# Altium PCB ESP32-S3-size-pcb-ad.PcbDoc
Units mil, origin at the board's own origin, x right, y up, seen from the top; angles counter-clockwise.
Board outline 1100 x 2250 mil, 2 copper layers (Top Layer, Bottom Layer); 5 components, 0 nets, 121 pads, 0 vias.
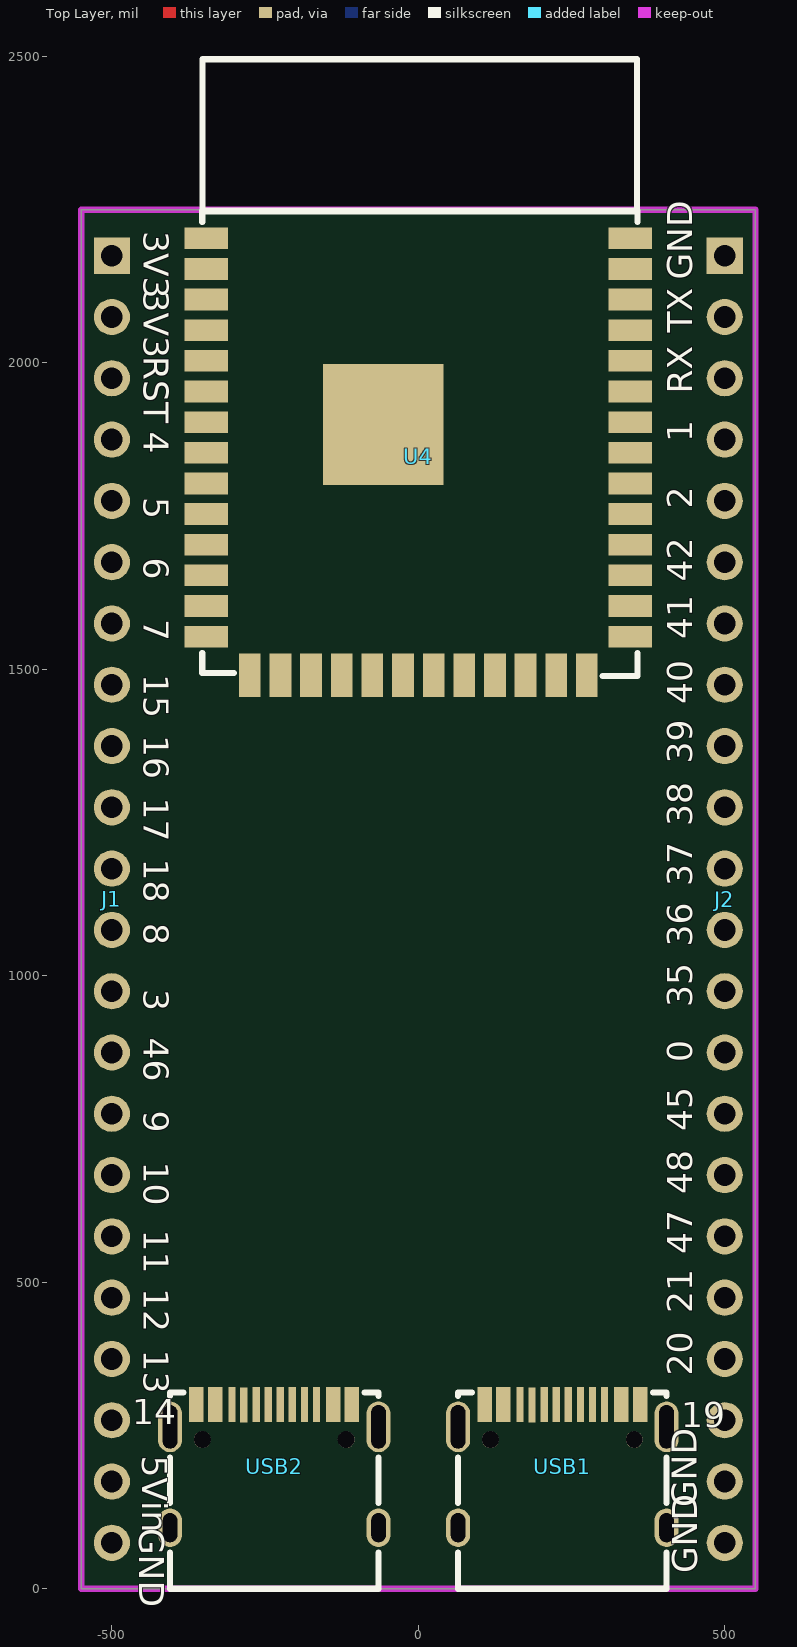
[diagram p0: Top Layer view]
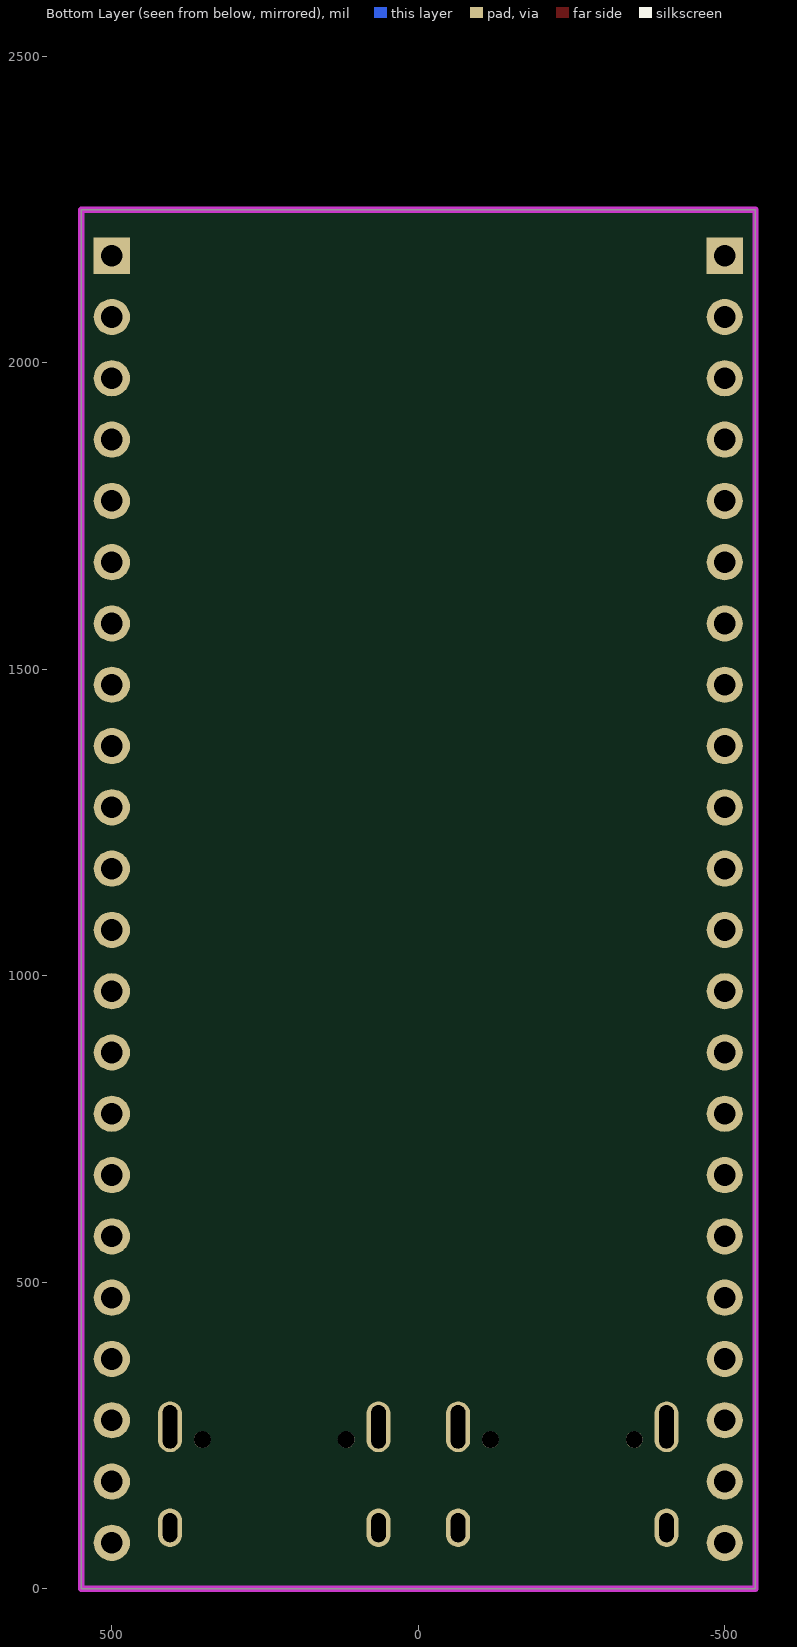
[diagram p1: Bottom Layer view, seen from below]

## Layer stack, top to bottom
Top Solder: solder mask 0.4, Solder Resist, Dk 3.5
Top Layer: signal copper 1.4
Dielectric 1: dielectric 12.6, FR-4, Dk 4.8
Bottom Layer: signal copper 1.4
Bottom Solder: solder mask 0.4, Solder Resist, Dk 3.5

## Board outline
-550,0 -550,2250 550,2250 550,0

## Design rules (kind name [scope] priority, off if disabled: settings)
Clearance [All] p1: gap=6 ignorepadtopadclearanceinfootprint=FALSE
ComponentClearance [All] p1: gap=0 collisioncheckmode=3 verticalgap=0 showdistances=FALSE
HoleToHoleClearance [All] p1: gap=0 allowstackedmicrovias=TRUE
MinimumSolderMaskSliver [All] p1: minsoldermaskwidth=0
PolygonConnect PolygonConnect_1 [(InPadClass('All Pads'))] p1: connectstyle=Relief reliefconductorwidth=20 reliefentries=4 polygonreliefangle="90 Angle" airgapwidth=10
PolygonConnect [All] p2: connectstyle=Direct reliefconductorwidth=10 reliefentries=4 polygonreliefangle="90 Angle" airgapwidth=10
RoutingVias [All] p1: holewidth=28 width=50 viastyle="Through Hole" minholewidth=28 minwidth=50 maxholewidth=28 maxwidth=50
SilkToSilkClearance [All] p1: silktosilkclearance=0
SilkToSolderMaskClearance [IsPad] p1: minsilkscreentomaskgap=0 clearancetoexposedcopper=TRUE
SolderMaskExpansion [All] p1: expansion=4 istentingtop=FALSE
Width [All] p1: maxlimit=100 minlimit=7 preferedwidth=7
25 further rules are at their usual default settings.

## Components (designator, comment, footprint, x,y, rotation, side; value= is the part's Value field where it differs from the comment)
J1 "Header 22" HDR1X22 -500,2175 r270 top
J2 "Header 22" HDR1X22 500,2175 r270 top
U4 "ESP32-S3-WROOM-1" WIFIM-SMD_39P-L25.5-W18.0-P1.27 0,1850 r0 top locked
USB1 "TYPEC-304-BCP16" USB-C-SMD_TYPEC-304-BCP16 235,200 r0 top locked
USB2 "TYPEC-304-BCP16" USB-C-SMD_TYPEC-304-BCP16 -235,200 r0 top locked

## Footprints (in the part's own frame and the unit in brackets; to place one, negate y for a bottom-side part, rotate by r counter-clockwise, add the part's x,y. Pads: shape width x height; smd on the part's side, far side on the other; paste and mask are expansions set on the pad)
HDR1X22 [mm] "Connector; Header; 22 Position"
  rect 1.5x1.5 hole 0.9: 1(0,0)
  round 1.5 hole 0.9: 2(2.54,0) 3(5.08,0) 4(7.62,0) 5(10.16,0) 6(12.7,0) 7(15.24,0) 8(17.78,0) 9(20.32,0) 10(22.86,0) 11(25.4,0) 12(27.94,0) 13(30.48,0) 14(33.02,0) 15(35.56,0) 16(38.1,0) 17(40.64,0) 18(43.18,0) 19(45.72,0) 20(48.26,0) 21(50.8,0) 22(53.34,0)
USB-C-SMD_TYPEC-304-BCP16 [mm]
  oval 1x2.1 hole 0.6 slot 1.8 at 90 deg: 13(-4.32,1.633) 14(4.32,1.633)
  oval 1x1.6 hole 0.6 slot 1.2 at 90 deg: 15(-4.32,-2.547) 16(4.32,-2.547)
  rect 0.6x1.45 smd: A1B12(-3.225,2.547) A4B9(-2.45,2.547) B1A12(3.22,2.547) B4A9(2.45,2.547)
  rect 0.3x1.45 smd: A5(-1.26,2.532) A6(-0.25,2.547) A7(0.25,2.547) A8(1.25,2.547) B5(1.75,2.547) B6(0.75,2.547) B7(-0.75,2.547) B8(-1.75,2.547)
  round 0.7 hole 0.7 unplated: ""(-2.98,1.102) ""(2.98,1.102)
  silkscreen extent -4.32,-5.08 4.32,3.05, body extent -4.44,-5.21 4.49,2.37, height 3.25
WIFIM-SMD_39P-L25.5-W18.0-P1.27 [mm]
  rect 1.8x0.9 smd: 1(-8.786,8.979) 2(-8.786,7.709) 3(-8.786,6.439) 4(-8.786,5.169) 5(-8.786,3.899) 6(-8.786,2.629) 7(-8.786,1.359) 8(-8.786,0.089) 9(-8.786,-1.181) 10(-8.786,-2.451) 11(-8.786,-3.721) 12(-8.786,-4.991) 13(-8.786,-6.261) 14(-8.786,-7.531) 27(8.786,-7.531) 28(8.786,-6.261) 29(8.786,-4.991) 30(8.786,-3.721) 31(8.786,-2.451) 32(8.786,-1.181) 33(8.786,0.089) 34(8.786,1.359) 35(8.786,2.629) 36(8.786,3.899) 37(8.786,5.169) 38(8.786,6.439) 39(8.786,7.709) 40(8.786,8.979)
  rect 0.9x1.8 smd: 15(-6.985,-9.129) 16(-5.715,-9.129) 17(-4.445,-9.129) 18(-3.175,-9.129) 19(-1.905,-9.129) 20(-0.635,-9.129) 21(0.635,-9.129) 22(1.905,-9.129) 23(3.175,-9.129) 24(4.445,-9.129) 25(5.715,-9.129) 26(6.985,-9.129)
  rect 5x5 smd: 41(-1.453,1.259)
  silkscreen extent -8.95,-9.16 9.08,16.4

## Part data
J1 J2: "Header, 22-Pin", LatestRevisionDate=17-Jul-2002, LatestRevisionNote="Re-released for DXP Platform.", Publisher="Altium Limited"
U4: BOM_JLCPCB Part Class="Extended Part", BOM_Manufacturer="Espressif Systems", BOM_Manufacturer Part=ESP32-WROOM-32(8MB), BOM_Supplier=LCSC, BOM_Supplier Part=C529582, Contributor=LCSC, spicePre=U, spiceSymbolName=ESP32-WROOM-32(8MB)
USB1 USB2: BOM_Manufacturer=XUNPU, BOM_Manufacturer Part=TYPEC-304-BCP16, BOM_Supplier=LCSC, BOM_Supplier Part=C720629, Contributor=LCSC, spicePre=U, spiceSymbolName=TYPEC-304-BCP16

## Nets (pads, with @x,y where several pads share a name; then routed paths per layer and width w, separated by ;. In a path a pad name is that pad's centre, name@x,y a point inside that pad or via, vN(x,y) a via of type N, cw(c..) or ccw(c..) an arc to the next point about the centre after c; other vN are vias at no path point)
pads on no net: J1.1 J1.2 J1.3 J1.4 J1.5 J1.6 J1.7 J1.8 J1.9 J1.10 J1.11 J1.12 J1.13 J1.14 J1.15 J1.16 J1.17 J1.18 J1.19 J1.20 J1.21 J1.22 J2.1 J2.2 J2.3 J2.4 J2.5 J2.6 J2.7 J2.8 J2.9 J2.10 J2.11 J2.12 J2.13 J2.14 J2.15 J2.16 J2.17 J2.18 J2.19 J2.20 J2.21 J2.22 U4.1 U4.2 U4.3 U4.4 U4.5 U4.6 U4.7 U4.8 U4.9 U4.10 U4.11 U4.12 U4.13 U4.14 U4.15 U4.16 U4.17 U4.18 U4.19 U4.20 U4.21 U4.22 U4.23 U4.24 U4.25 U4.26 U4.27 U4.28 U4.29 U4.30 U4.31 U4.32 U4.33 U4.34 U4.35 U4.36 U4.37 U4.38 U4.39 U4.40 U4.41 USB1. USB1.13 USB1.14 USB1.15 USB1.16 USB1.A1B12 USB1.A4B9 USB1.A5 USB1.A6 USB1.A7 USB1.A8 USB1.B1A12 USB1.B4A9 USB1.B5 USB1.B6 USB1.B7 USB1.B8 USB2. USB2.13 USB2.14 USB2.15 USB2.16 USB2.A1B12 USB2.A4B9 USB2.A5 USB2.A6 USB2.A7 USB2.A8 USB2.B1A12 USB2.B4A9 USB2.B5 USB2.B6 USB2.B7 USB2.B8

## Polygon pours and split planes (outlines as drawn)
no net on Top Layer "NONET_L01_P003" (solid, pour order 3): -462,2250
no net on Top Layer "NONET_L01_P000" (solid, pour order 0): 419.97,2250

## Keep-outs
Keep-Out Layer:
  the board outline again, w10

## Silkscreen, mask and mechanical layers (free items; w line width, h text height)
Top Overlay:
  text "3V3" at -461.94,2215 h70 r270
  text "GND" at 461,2136 h70 r90
  text "3V3" at -461.94,2118 h70 r270
  text "TX" at 461,2049.5 h70 r90
  text "RST" at -461.97,2011 h70 r270
  text "RX" at 461,1949.5 h70 r90
  text "4" at -461.97,1888 h70 r270
  text "1" at 461,1871 h70 r90
  text "5" at -461.97,1781 h70 r270
  text "2" at 461,1762 h70 r90
  text "6" at -461.97,1682 h70 r270
  text "42" at 461,1643 h70 r90
  text "7" at -461.97,1582 h70 r270
  text "41" at 461,1549.5 h70 r90
  text "15" at -461.97,1491.8 h70 r270
  text "40" at 461,1443 h70 r90
  text "16" at -461.97,1393 h70 r270
  text "39" at 461,1346.3 h70 r90
  text "17" at -461.97,1291 h70 r270
  text "38" at 461,1244 h70 r90
  text "18" at -461.97,1191.14 h70 r270
  text "37" at 461,1146.5 h70 r90
  text "8" at -461.97,1085.99 h70 r270
  text "36" at 461,1047.39 h70 r90
  text "3" at -461.97,978.22 h70 r270
  text "35" at 461,948.5 h70 r90
  text "46" at -461.97,899 h70 r270
  text "0" at 461,859 h70 r90
  text "9" at -461.97,779.75 h70 r270
  text "45" at 461,746.5 h70 r90
  text "10" at -461.97,697.13 h70 r270
  text "48" at 461,644 h70 r90
  text "11" at -461.97,585.61 h70 r270
  text "47" at 461,546 h70 r90
  text "12" at -461.97,490 h70 r270
  text "21" at 461,449.5 h70 r90
  text "13" at -461.97,389.91 h70 r270
  text "20" at 461,348 h70 r90
  text "14" at -467,255 h70
  text "19" at 429,249.31 h70
  text "5Vin" at -464.66,217 h70 r270
  text "GND" at 468,133 h70 r90
  text "GND" at -468.97,99 h70 r270
  text "GND" at 468.76,25 h70 r90

## Dimensions
550,0 to 356.83,2495.63 on Top Overlay
-500,75 to 500,75 on Top Overlay
-550,0 to 550,0 on Top Overlay
-500,2175 to -550,2250 on Top Overlay
-500,75 to -550,0 on Top Overlay
-550,0 to -550,2250 on Top Overlay
-500,2175 to -500,75 on Top Overlay